# Altium PCB 28Pins_Project_V1I1_PCB.PcbDoc (part 3 of 3)
Units mm, origin at the board's own origin, x right, y up, seen from the top; angles counter-clockwise.
Board outline 68.58 x 53.34 mm, 2 copper layers (L1, L2), stack 1.671 mm thick; 106 components, 71 nets, 323 pads, 106 vias.
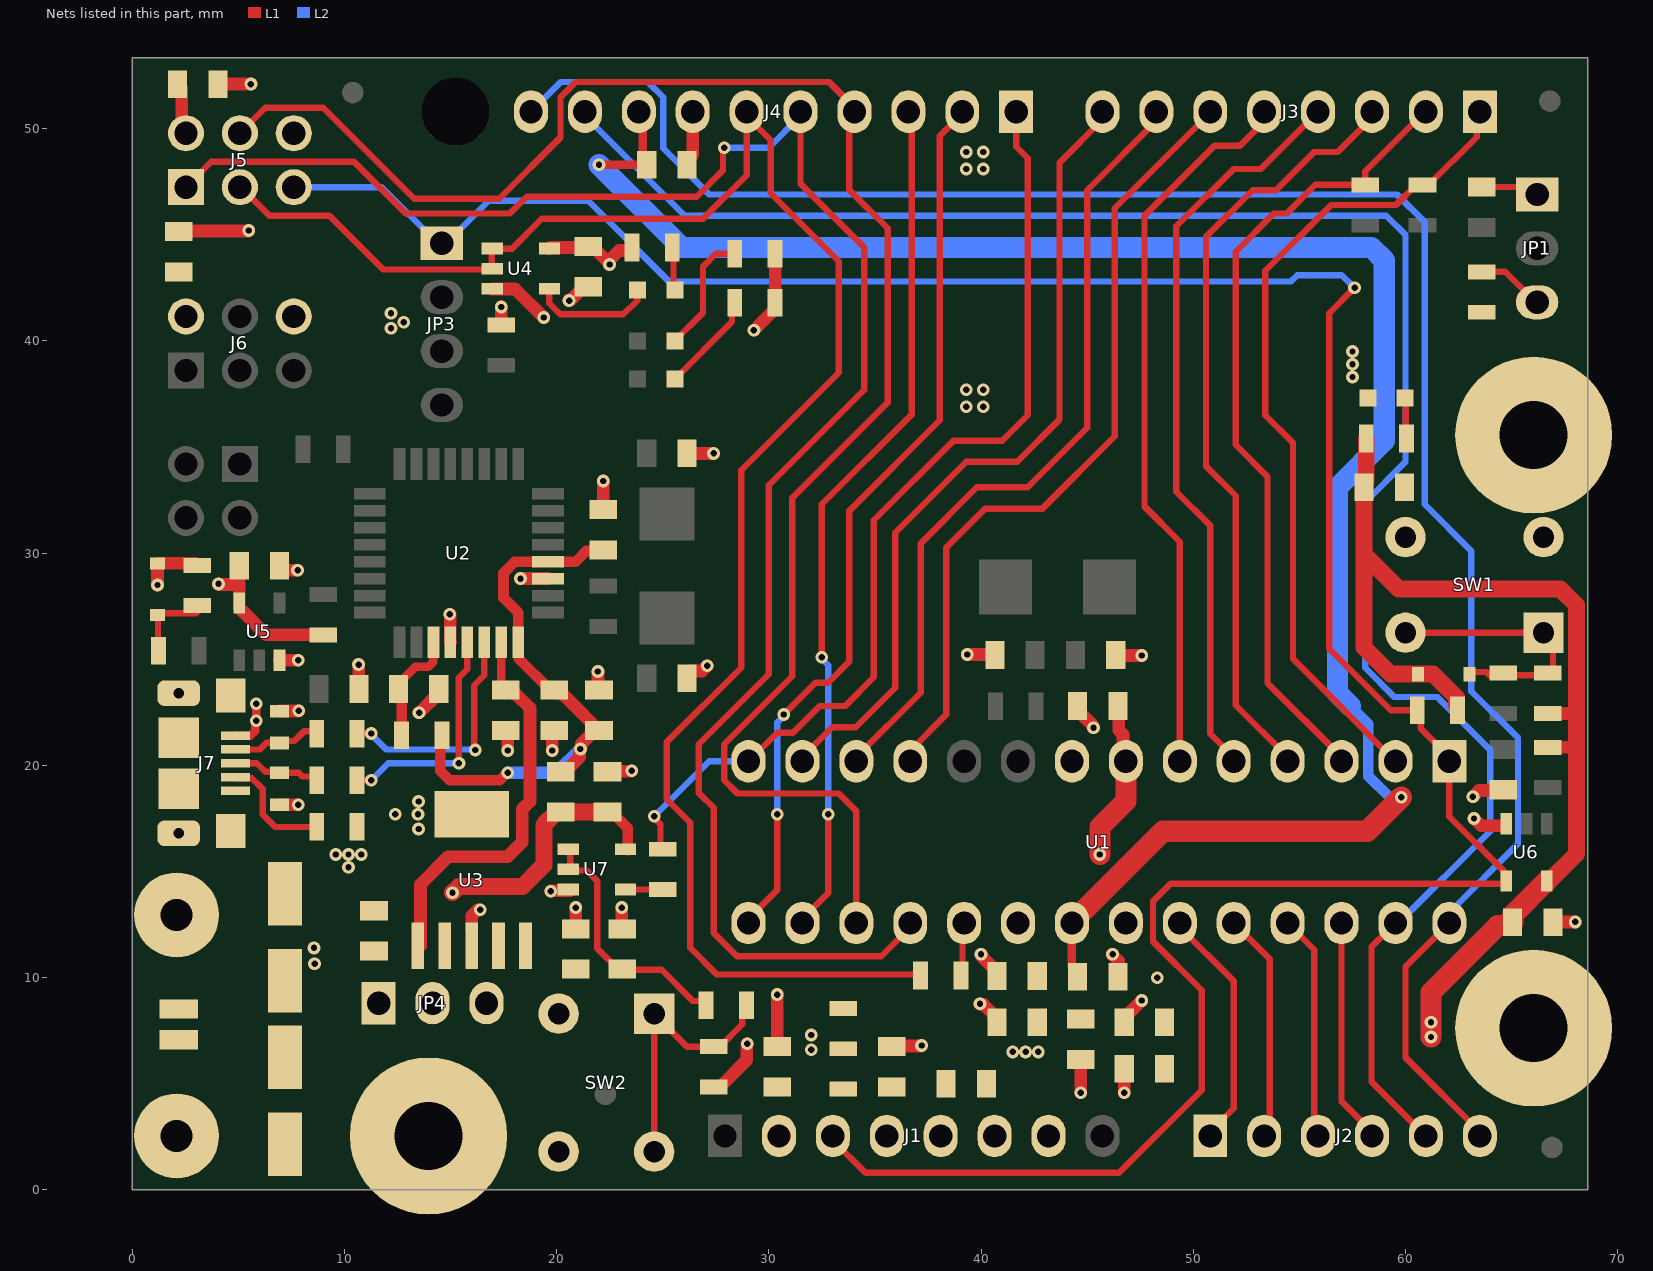
[diagram p2: the nets of this part, all layers, seen from the top]

## Via types
v1: diameter 0.6, hole 0.3, L1 to L2, tented both sides, 106 vias

## Nets (pads, with @x,y where several pads share a name; then routed paths per layer and width w, separated by ;. In a path a pad name is that pad's centre, name@x,y a point inside that pad or via, vN(x,y) a via of type N, cw(c..) or ccw(c..) an arc to the next point about the centre after c; other vN are vias at no path point) (continued)
328P_RESETn: J1.3 J5.5 JP3.1 R14.1 U1.1 U6.4 | length 133.2
  L1 w0.3: J1.3@33.02,2.54 33.02,2.34 34.56,0.8 46.5,0.8 50.4,4.7 50.4,9.4 48.1,11.7 48.1,13.6 48.925,14.425 64.625,14.425 U6.4@64.75,14.55 64.625,14.675 64.625,15.025 62.065,17.585 U1.1@62.065,20.193 62.065,20.393 60.722,21.736 60.722,22.428 R14.1@60.55,22.6 59.3,22.6 56.4,25.5 56.4,41.3 v1(57.6,42.5)
  L2 w0.3: J5.5@7.62,47.244 11.756,47.244 14.4,44.6 JP3.1@14.6,44.6 14.8,44.6 16.8,46.6 21.5,46.6 25.3,42.8 54.6,42.8 54.9,43.1 57,43.1 v1(57.6,42.5)
+3V3: C13.2 C16.2 J1.4 JP4.3 R28.2 U3.4 U3.5
+3V3_16U2_UCAP: C7.2 R26.1 U2.27 | length 5.5
  L1 w0.4: C7.2@12.55,23.6 12.8,23.85 12.8,24.1 13.35,24.65 13.966,24.65 14.2,24.884 U2.27@14.2,25.8
  L1 w0.5: C7.2@12.55,23.6 12.7,23.45 R26.1@12.7,21.425
+5/3V3_16U2: C3.2 C4.2 C5.2 FB1.2 R26.2 U2.4 U2.32 | length 26.6
  L1 w0.5: R26.2@14.6,21.425 14.525,21.35 14.525,19.739 14.964,19.3 17.323,19.3 17.673,19.65 v1(17.7,19.65) ; C4.2@19.9,23.55 19.7,23.55 18.225,25.025 18.225,25.775 U2.32@18.2,25.8 18.2,27.2 17.5,27.9 17.5,29.061 18.039,29.6 U2.4@19.6,29.6 20.9,29.6 21.4,30.1 22.15,30.1 C5.2@22.2,30.15
  L1 w0.6: C4.2@19.9,23.55 20.05,23.4 20.25,23.4 20.975,22.675 21.65,22 21.65,21.8 21.8,21.65 C3.2@22,21.65 ; FB1.2@20.2,19.7 20.4,19.7 21.087,20.387 21.087,20.737 v1(21.125,20.775) 21.163,20.813 21.163,21.013 C3.2@21.775,21.625
  L2 w0.6: v1(17.7,19.65) 20,19.65 v1(21.125,20.775)
+5/3V3_328P_AVCC: C22.2 C23.2 FB3.2 U1.20
+5/3V3_328P_VCC: C19.2 C20.2 FB2.2 U1.7 | length 7.5
  L1 w0.6: C20.2@46.45,22.8 46.486,22.764 46.486,21.664 46.689,21.461 U1.7@46.689,20.329
  L1 w1: v1(45.6,15.8) 45.6,17.1 46.825,18.325 U1.7@46.825,20.193
  other v1: 48.3,10
+5V: C2.1 C6.2 C12.2 C14.2 J1.5 J8.1 JP4.1 L1.2 R27.1 U2.31 U3.1 U3.2 | length 18.8
  L1 w0.4: U2.31@17.4,25.8 17.4,23.8 17.65,23.55 C6.2@17.7,23.55
  L1 w0.6: U3.1@13.59,11.5 13.59,14.39 14.9,15.7 17.7,15.7 18.38,16.38 18.38,17.93 18.75,18.3 18.75,22.7 18.05,23.4 17.85,23.4 C6.2@17.7,23.55
+5V/3V3: C8.2 C15.2 C18.2 C26.2 C28.2 C29.2 C30.2 C34.2 D5.1 D6.1 FB1.1 FB2.1 FB3.1 J1.2 J5.2 J6.2 JP4.2 R1.2 R2.2 R3.2 R4.2 R14.2 R15.2 R17.2 R18.2 R19.2 R20.2 R21.2 R27.2 R28.1 U4.5 U5.5 U6.5 U7.5 | length 92.7
  L1 w0.5: C29.2@22.4,17.8 22.6,17.8 23.35,17.05 U7.5@23.35,16
  L1 w0.6: v1(1.2,28.5) D5.1@1.2,29.519 R19.2@3.003,29.519 ; C18.2@2.15,52.1 2.345,51.905 2.345,49.979 J5.2@2.54,49.784 ; v1(4.075,28.55) 4.1,28.525 5.05,28.525 ; C30.2@5.05,29.4 5.05,28.525 ; R4.2@9,26.15 6.325,26.15 5.05,27.425 U5.5@5.05,27.65 5.05,28.525 ; v1(17.4,41.6) 17.4,40.8 17.45,40.75 R1.2@17.7,40.75 ; U4.5@19.65,44.35 19.7,44.4 21.45,44.4 C26.2@21.5,44.45 21.7,44.45 22.5,43.65 v1(22.5,43.6) ; v1@22.475,43.779 22.95,44.254 23.404,44.254 R15.2@23.55,44.4 ; R21.2@27.4,4.85 27.7,4.85 28.962,6.112 28.962,6.862 v1(28.981,6.881) ; v1@29.5,40.7 30.3,41.5 R3.2@30.3,41.8 R2.2@30.3,44.1 ; v1(44.7,4.575) FB3.1@44.7,6.15 ; v1(46.75,4.575) FB2.1@46.75,5.7 ; R18.2@66.7,20.85 68.05,20.85 ; R20.2@66.7,22.45 68.05,22.45
  L1 w0.8: v1(15.1,14) 15.4,14.3 18.4,14.3 19.4,15.3 19.4,17.2 20,17.8 FB1.1@20.2,17.8 C29.2@22.4,17.8 ; R17.2@58.15,35.4 58.15,33.4 58.05,33.3 C34.2@58.05,33.1 58.05,29.95 ; R14.2@62.4,22.85 62.4,23.2 61.3,24.3 D6.1@60.581,24.3 59.3,24.3 58.05,25.55 58.05,29.95 ; U6.5@66.75,14.55 66.775,14.55 68.05,15.825 68.05,20.85 68.05,22.45 68.05,27.55 67.3,28.3 59.7,28.3 58.05,29.95
  L1 w1: v1(61.2,7.2) v1(61.2,7.9) 61.2,9.3 64.35,12.45 65,12.45 65,12.55 C28.2@65.05,12.6 ; C28.2@65.05,12.75 65.05,12.95 U6.5@66.65,14.55
  other v1: 32,6.6 32,7.3 29.3,40.5 12.2,40.6 12.8,40.875 12.2,41.3
+5V_USB: C1.1 J7.1 L1.1 | length 2.3
  L1 w0.4: J7.1@4.875,21.4 5.577,21.4 5.812,21.634 5.812,22.062 v1(5.85,22.1) v1(5.85,22.9)
  other v1: 8.6,10.65 8.575,11.4
+AREF: C21.2 C24.2 J4.8 U1.21 | length 92.2
  L1 w0.4: v1(22,48.3) C21.2@24.25,48.3 24.25,48.55 24.3,48.6 24.213,48.6 24.063,48.75 24.063,50.613 J4.8@23.876,50.8 ; U1.21@44.285,12.573 44.285,10.515 44.55,10.25 C24.2@44.55,10.1
  L1 w1: U1.21@44.285,12.573 44.285,12.611 48.574,16.9 58.2,16.9 v1(59.8,18.5)
  L2 w0.5: 57.4,22.8 58.25,21.95 58.25,19.5 59.231,18.519 59.781,18.519 v1(59.8,18.5)
  L2 w1: v1(22,48.3) 25.9,44.4 58.4,44.4 59,43.8 59,35.3 56.8,33.1 56.8,23.4 57.4,22.8
AD0: J2.1 U1.23 | length 11.5
  L1 w0.3: U1.23@49.365,12.573 49.365,12.373 51.9,9.838 51.9,3.84 50.8,2.74 J2.1@50.8,2.54
AD1: J2.2 U1.24 | length 10.8
  L1 w0.3: U1.24@51.905,12.573 53.6,10.878 53.6,3.352 53.34,3.092 J2.2@53.34,2.54
AD2: J2.3 U1.25 | length 10.6
  L1 w0.3: U1.25@54.445,12.573 55.7,11.318 55.7,2.72 J2.3@55.88,2.54
AD3: J2.4 U1.26 | length 10.6
  L1 w0.3: U1.26@56.985,12.573 56.985,4.175 58.42,2.74 J2.4@58.42,2.54
AD4/SDA: J2.5 J4.9 U1.27 | length 91.5
  L1 w0.3: U1.27@59.525,12.573 58.4,11.448 58.4,5.1 J2.5@60.96,2.54
  L2 w0.3: J4.9@21.336,50.8 21.336,50.6 26.036,45.9 59.1,45.9 60,45 60,34.3 58.1,32.4 58.1,24.6 59.475,23.225 61.5,23.225 64,20.725 64,16.9 59.673,12.573 U1.27@59.525,12.573
AD5/SCL: J2.6 J4.10 U1.28 | length 95.4
  L1 w0.3: U1.28@62.065,12.573 60,10.508 60,6.24 63.5,2.74 J2.6@63.5,2.54
  L2 w0.3: J4.10@18.796,50.8 20.196,52.2 24.302,52.2 25.026,51.476 25.026,49.074 27.2,46.9 59.6,46.9 60.9,45.6 60.9,32.3 63.1,30.1 63.1,23.5 65.3,21.3 65.3,16.3 62.065,13.065 U1.28@62.065,12.573
BUTTON_RESETn: D6.2 R20.1 R24.1 SW1.1 SW1.2 | length 12.9
  L1 w0.3: SW1.2@60.35,26.25 66.85,26.25 66.95,26.15 66.95,24.45 67.15,24.25 67.2,24.25 67.05,24.25 65,24.25 63.95,24.25 63.8,24.4 63.119,24.4 D6.2@63.194,24.325
CON_USB_N: J7.2 R6.1 Z1.2 | length 4
  L1 w0.3: J7.2@4.875,20.75 6.025,20.75 6.35,21.075 6.925,21.075 Z1.2@6.95,21.05 ; Z1.2@6.95,21.15 7.65,21.15 8.1,21.6 ; 8.15,21.6 R6.1@8.6,21.6
CON_USB_P: J7.3 R7.1 Z2.2 | length 4
  L1 w0.3: J7.3@4.875,20.1 5.875,20.1 6.275,19.7 6.9,19.7 Z2.2@6.95,19.65 7.85,19.65 8.026,19.474 8.526,19.474 R7.1@8.6,19.4
GND: C1.2 C2.2 C3.1 C4.1 C5.1 C6.1 C7.1 C8.1 C9.1 C10.2 C12.1 C13.1 C14.1 C15.1 C16.1 C18.1 C19.1 C20.1 C21.1 C22.1 C23.1 C24.1 C25.1 C26.1 C27.2 C28.1 C29.1 C30.1 C31.1 C32.1 C33.1 C34.1 D1.1 J1.6 J1.7 J4.7 J5.6 J6.6 J7.5 J7.6 J7.7 J7.8 J7.9 J7.10 J7.11 J9.1 MH1.1 MH2.1 MH3.1 R8.2 R12.1 SW1.3 SW1.4 SW2.3 SW2.4 U1.8 U1.22 U2.3 U2.28 U3.3 U3.6 U4.3 U5.3 U6.3 U7.3 Z1.1 Z2.1 | length 49.7
  L1 w0.6: C8.1@2.2,45.15 2.225,45.175 5.475,45.175 v1(5.5,45.2) ; C18.1@4.05,52.1 v1(5.6,52.1) ; Z2.1@6.95,18.15 v1(7.825,18.15) ; Z1.1@6.95,22.55 6.963,22.562 7.838,22.562 v1(7.85,22.575) ; U5.3@6.95,24.95 v1(7.825,24.95) ; C30.1@6.95,29.4 6.95,29.35 7.1,29.2 v1(7.8,29.2) ; v1(10.675,24.75) 10.687,24.737 10.687,23.613 C31.1@10.7,23.6 ; v1(13.525,22.475) 14.45,23.4 C7.1@14.45,23.6 ; v1(14.975,27.125) 14.987,27.113 14.987,25.812 U2.28@15,25.8 ; U3.3@16,12.3 16,12.9 v1@16.3,13.2 ; U4.3@16.975,42.45 18.05,42.45 v1(19.4,41.1) ; v1(17.7,20.7) C6.1@17.7,21.65 ; v1(18.3,28.8) U2.3@19.6,28.8 ; v1(19.725,14.075) 19.737,14.088 20.637,14.088 U7.3@20.65,14.1 ; v1(19.8,20.7) 19.8,21.55 C4.1@19.9,21.65 ; v1(20.593,41.9) 20.631,41.938 20.688,41.938 21.3,42.55 C26.1@21.5,42.55 ; C13.1@20.9,12.3 v1(20.9,13.3) ; v1(21.95,24.425) 21.95,23.6 C3.1@22,23.55 ; C5.1@22.2,32.05 v1(22.2,33.4) ; C29.1@22.4,19.7 22.425,19.725 23.525,19.725 v1(23.55,19.75) ; v1(23.075,13.3) 23.075,12.325 C33.1@23.1,12.3 ; C10.2@26.15,24.1 26.15,24.3 26.3,24.45 26.85,24.45 v1(27.1,24.7) ; C9.1@26.15,34.7 v1(27.4,34.7) ; C21.1@26.15,48.3 26.15,48.5 26.416,48.766 J4.7@26.416,50.8 ; C15.1@30.4,6.75 v1(30.4,9.2) ; C16.1@35.6,6.75 C16.1@35.8,6.75 35.825,6.775 37.175,6.775 v1(37.2,6.8) ; v1(39.35,25.225) 40.625,25.225 C25.1@40.65,25.2 ; v1(39.95,8.775) 39.988,8.737 40.113,8.737 40.75,8.1 C22.1@40.75,7.9 ; v1(40,11.1) 40.038,11.062 40.038,10.987 40.75,10.275 C23.1@40.75,10.1 ; C20.1@44.55,22.8 44.55,22.6 45.262,21.888 45.262,21.813 v1(45.3,21.775) ; v1(46.2,11.1) 46.2,11.066 46.475,10.791 46.475,10.125 C24.1@46.45,10.1 ; C27.2@46.375,25.175 v1(47.575,25.175) ; C19.1@46.75,7.9 46.75,8.1 v1(47.575,8.925) ; v1(63.175,18.525) 63.464,18.814 64.564,18.814 C32.1@64.6,18.85 ; v1(63.225,17.5) 63.575,17.15 U6.3@64.725,17.15 ; C28.1@66.95,12.6 66.975,12.625 v1(68,12.625)
  other v1: 41.5,6.5 42.1,6.5 42.7,6.5 16.4,13.2 10.2,15.2 9.6,15.8 10.2,15.8 10.8,15.8 13.5,17 12.4,17.7 13.475,17.7 13.5,18.3 39.3,36.9 40.1,36.9 39.3,37.7 40.1,37.7 57.5,38.3 57.5,38.9 57.5,39.5 39.3,48.1 40.1,48.1 39.3,48.9 40.1,48.9
IO0: J3.1 R10.2 U1.2 | length 39.5
  L1 w0.3: U1.2@59.525,20.193 54.7,25.018 54.7,35.2 53.4,36.5 53.4,43.3 56.5,46.4 59.55,46.4 60.5,47.35 R10.2@60.8,47.35 61.1,47.35 63.35,49.6 63.35,50.65 J3.1@63.5,50.8
IO1: J3.2 R11.2 U1.3 | length 38.1
  L1 w0.3: U1.3@56.985,20.193 56.985,20.393 53.5,23.878 53.5,33.6 52,35.1 52,44.2 53.8,46 54.4,46 55.75,47.35 R11.2@58.1,47.35 58.1,48 60.9,50.8 J3.2@60.96,50.8
IO2: J3.3 U1.4 | length 36.7
  L1 w0.3: U1.4@54.445,20.193 54.445,20.393 52,22.838 52,32.7 50.6,34.1 50.6,44.9 52.8,47.1 53.9,47.1 55.7,48.9 56.8,48.9 58.42,50.52 J3.3@58.42,50.8
IO3: J3.4 U1.5 | length 35.2
  L1 w0.3: U1.5@51.905,20.193 51.905,20.393 50.8,21.498 50.8,31.3 49.2,32.9 49.2,45.4 51.9,48.1 53.18,48.1 J3.4@55.88,50.8
IO4: J3.5 U1.6 | length 34.3
  L1 w0.3: U1.6@49.365,20.193 49.365,30.535 47.7,32.2 47.7,45.9 51,49.2 52.2,49.2 53.34,50.34 J3.5@53.34,50.8
IO5: J3.6 U1.11 | length 38
  L1 w0.3: U1.11@36.665,20.193 36.665,20.691 38.353,22.379 38.353,30.253 40.2,32.1 42.9,32.1 46.3,35.5 46.3,46.256 50.8,50.756 J3.6@50.8,50.8
IO6: J3.7 U1.12 | length 37.9
  L1 w0.3: U1.12@34.125,20.193 34.125,20.393 37.153,23.421 37.153,30.453 39.8,33.1 42.2,33.1 45,35.9 45,47.1 48.26,50.36 J3.7@48.26,50.8
IO7: J3.8 U1.13 | length 38.5
  L1 w0.3: U1.13@31.585,20.193 31.585,20.393 32.992,21.8 34.1,21.8 35.953,23.653 35.953,30.953 39.3,34.3 41.7,34.3 43.7,36.3 43.7,48.4 45.72,50.42 J3.8@45.72,50.8
IO8: J4.1 R22.2 U1.14 | length 46.2
  L1 w0.3: v1(24.6,17.6) 24.6,17.519 24.9,17.219 24.9,16.25 25.15,16.25 R22.2@25.3,16.1 ; U1.14@29.045,20.193 30.395,21.543 31.143,21.543 32.4,22.8 33.6,22.8 34.953,24.153 34.953,31.553 38.7,35.3 41,35.3 42.2,36.5 42.2,48.6 41.656,49.144 J4.1@41.656,50.8
  L2 w0.3: v1(24.6,17.6) 27.196,20.197 29.041,20.197 U1.14@29.045,20.193
IO9: J4.2 U1.15 | length 42.8
  L1 w0.3: U1.15@29.045,12.573 29.045,12.773 30.4,14.128 v1(30.4,17.7) ; v1(30.7,22.4) 31.329,23.029 32.2,23.9 32.8,23.9 33.8,24.9 33.8,32 38.053,36.253 38.053,49.653 39.116,50.716 J4.2@39.116,50.8
  L2 w0.3: v1(30.4,17.7) 30.4,22.019 30.7,22.319 v1(30.7,22.4)
MISO: J4.5 J5.1 U1.18 | length 87.1
  L1 w0.3: J5.1@2.54,47.244 3.74,48.444 10.456,48.444 12.9,46 17.8,46 18.6,46.8 26.6,46.8 27.843,48.043 27.843,49.043 v1(27.9,49.1) ; J4.5@31.496,50.8 31.496,47.404 34.5,44.4 34.5,37.7 30,33.2 30,24.3 26.7,21 26.7,18.7 27.4,18 27.4,12.1 28.5,11 35.292,11 36.665,12.373 U1.18@36.665,12.573
  L2 w0.3: v1(27.9,49.1) 29.996,49.1 31.496,50.6 J4.5@31.496,50.8
MOSI: J4.4 J5.4 U1.17 | length 82.9
  L1 w0.3: J5.4@5.08,49.784 6.28,50.984 9.016,50.984 13.3,46.7 17.3,46.7 20.186,49.586 20.186,51.476 20.91,52.2 32.836,52.2 34.036,51 J4.4@34.036,50.8 33.8,50.564 33.8,47.1 35.6,45.3 35.6,37.1 31.1,32.6 31.1,24.2 27.895,20.995 27.895,19.517 27.9,19.512 27.9,19.3 28.525,18.675 33.3,18.675 34.125,17.85 U1.17@34.125,12.573
NetC11_2: C11.2 JP1.1 | length 2.7
  L1 w0.3: C11.2@63.6,47.25 65.85,47.25 JP1.1@66.2,46.9
NetD1_2: D1.2 R17.1 | length 1.9
  L1 w0.3: D1.2@59.975,37.3 60.012,37.263 60.012,35.438 R17.1@60.05,35.4
NetD2_1: D2.1 U4.4 | length 5.8
  L1 w0.3: U4.4@19.65,42.45 19.65,41.769 20.169,41.25 23.15,41.25 23.8,41.9 23.8,42.375 D2.1@23.825,42.4
NetD2_2: D2.2 R15.1 | length 2.1
  L1 w0.3: R15.1@25.45,44.4 25.512,44.337 25.512,42.462 D2.2@25.575,42.4
NetD3_2: D3.2 R2.1 | length 5.8
  L1 w0.3: D3.2@25.575,40 26.9,41.325 26.9,43.5 27.5,44.1 R2.1@28.4,44.1
NetD4_2: D4.2 R3.1 | length 4.8
  L1 w0.3: D4.2@25.575,38.2 28.269,40.894 28.269,41.669 R3.1@28.4,41.8
NetD5_2: D5.2 R19.1 R23.1 | length 3.7
  L1 w0.3: R23.1@1.25,25.4 1.225,25.425 1.225,27.056 D5.2@1.2,27.081 1.285,27.165 3.015,27.165 R19.1@3.1,27.25
NetJ7_4: J7.4 R8.1 | length 5.5
  L1 w0.3: J7.4@4.875,19.45 4.925,19.4 5.644,19.4 6.15,18.894 6.15,17.705 6.755,17.1 R8.1@8.7,17.1
NetJP1_3: JP1.3 R12.2 | length 3.2
  L1 w0.3: R12.2@63.6,43.25 64.7,43.25 66.13,41.82 JP1.3@66.2,41.82
NetR22_1: R22.1 U7.4 | length 2
  L1 w0.3: U7.4@23.35,14.1 23.4,14.15 25.25,14.15 R22.1@25.3,14.2
SCK: J4.6 J5.3 R13.2 U4.1 U4.2 | length 87
  L1 w0.3: J5.3@5.08,47.244 5.133,47.244 6.477,45.9 9.3,45.9 11.836,43.364 16.939,43.364 U4.2@16.975,43.4 ; U4.2@16.953,43.422 16.953,44.328 U4.1@16.975,44.35 ; U4.1@17.003,44.35 17.903,44.35 19.303,45.75 26.903,45.75 28.959,47.806 J4.6@28.959,50.594 ; J4.6@28.956,50.8 28.956,50.597 J4.6@28.959,50.594 ; R13.2@37.15,10.1 37.1,10.15 27.55,10.15 26.3,11.4 26.3,17.3 25.2,18.4 25.2,21.1 28.7,24.6 28.7,33.9 33.3,38.5 33.3,43.753 30.1,46.953 30.1,49.453 J4.6@28.959,50.594
SCK_R: R13.1 U1.19 | length 2.5
  L1 w0.3: R13.1@39.05,10.1 39.127,10.178 39.127,12.495 U1.19@39.205,12.573
SS: J4.3 U1.16 | length 40.7
  L1 w0.3: U1.16@31.585,12.573 31.585,12.773 32.8,13.988 v1(32.8,17.7) ; v1(32.5,25.099) 32.5,32.3 36.729,36.529 36.729,50.647 J4.3@36.576,50.8
  L2 w0.3: v1(32.5,25.099) 32.5,25.018 32.8,24.718 v1(32.8,17.7)
USB_N: R6.2 U2.30 | length 11.3
  L1 w0.3: R6.2@10.5,21.5 v1(11.275,21.5) ; v1(16.175,20.725) 16.125,20.775 16.125,23.77 16.6,24.245 U2.30@16.6,25.8
  L2 w0.3: v1@11.225,21.5 11.975,20.75 16.15,20.75 v1(16.175,20.725)
USB_P: R7.2 U2.29 | length 11.1
  L1 w0.3: R7.2@10.5,19.3 v1(11.275,19.3) ; v1(15.4,20.1) 15.4,24.13 15.8,24.53 U2.29@15.8,25.8
  L2 w0.3: v1(11.275,19.3) 12.075,20.1 v1(15.4,20.1)
USER_BUTTON: R21.1 R25.1 SW2.1 SW2.2 | length 12.7
  L1 w0.3: SW2.2@24.6,1.8 SW2.1@24.6,8.3 26.15,6.75 R21.1@27.4,6.75 27.7,6.75 28.75,7.8 28.75,8.5 R25.1@28.95,8.7
USER_BUTTON_BUF: C33.2 R25.2 U7.1 U7.2 | length 11.8
  L1 w0.3: U7.1@20.65,16 20.65,15.05 21.425,15.05 21.925,14.55 21.925,11.375 22.9,10.4 C33.2@23.1,10.4 23.125,10.375 24.95,10.375 26.426,8.899 26.851,8.899 R25.2@27.05,8.7
pads on no net: FID1.1 FID2.1 FID3.1 FID4.1 J1.1 J1.8 MH4.1 U2.5 U2.6 U2.7 U2.12 U2.14 U2.22 U2.23 U2.25 U2.26

## Polygon pours and split planes (outlines as drawn)
+5/3V3_328P_VCC on L2 "+5/3V3_328P_VCC_L02_P000" (solid, remove dead copper, pour order 0): 45.105,16.2 45.097,15.195 46.055,15.195 47.93,13.816 47.831,9.5 50.778,9.5 50.778,16.2
GND on L2 "GND_L02_P007" (solid, remove dead copper, pour order 7): 57.1,39.8 55.3,38 23.252,38 20.9,40.1 20.9,42.2 19.1,42.2 19.1,37.57 12.4,37.57 12.4,39.27 9.5,39.27 9.5,52.97 0.2,52.97 0.2,51.37 5.2,51.37 5.2,23.57 7.4,23.57 7.4,17.77 9.2,17.77 9.2,14.8 16,14.8 16,12.9 26.5,12.9 26.5,12.6 30.383,8.717 34.453,8.717 37.1,6.07 50.5,6.07 53,8.57 62.2,8.57 62.2,0.27 68.2,0.27 68.2,13.77 63.4,13.77 63.4,11.37 58.4,11.37 58.3,11.47 58.3,14.37 60.6,14.37 63.5,17.27 63.5,18.97 61.2,18.97 61.2,17.37 57.8,17.37 56.6,18.57 55.9,18.57 55.9,33.848 57.982,35.846 57.982,39.8
+5V on L2 "+5V_L02_P002" (solid, remove dead copper, pour order 2): 0.3,0.3 0.3,5.7 8.7,5.7 10.7,7.7 10.7,9.9 12.5,9.9 12.5,7.5 18.9,7.5 22.7,3.7 26.8,3.7 26.8,1.2 37,1.2 37,3.8 39.3,3.8 39.3,0.3
+3V3 on L2 "+3V3_L02_P003" (solid, remove dead copper, pour order 3): 15.8,7.8 19.2,7.8 23,4 33.7,4 34.7,3 34.7,1.5 36.4,1.5 36.4,3.7 34.2,5.9 28.7,5.9 27.55,7.05 23.2,7.05 23.2,9.1 21.6,10.7 20.1,10.7 16.5,10.7 15.8,10
+5V/3V3 on L2 "+5V/3V3_L02_P005" (solid, remove dead copper, pour order 5): 0.3,6 8.6,6 10.4,7.8 10.4,10.2 12.8,10.2 12.8,7.8 15.4,7.8 15.4,9.9 16.5,11 21.9,11 23.4,9.5 25.9,9.5 25.9,7.4 28,7.4 29.1,6.3 34.4,6.3 36.6,4.1 39.8,4.1 39.8,0.3 62,0.3 62,8.3 53.2,8.3 50.7,5.8 37.1,5.8 34.4,8.5 30.1,8.5 26.2,12.4 15.6,12.4 15.6,14.4 9.3,14.4 9.3,10 7.7,10 7.7,12.2 7,12.9 7,14.5 5.6,15.9 5.6,18.4 4.9,19.1 4.9,51.1 0.3,51.1
+5V/3V3 on L2 "+5V/3V3_L02_P001" (solid, remove dead copper, pour order 1): 24.411,42.077 30.7,42.121 30.7,40 23.476,40 21.124,42.6 18.6,42.6 18.6,38.1 13,38.1 13,39.7 10.1,39.7 10.1,43.5 16.3,43.5 16.3,45.4 21.272,45.4
GND on L2 "GND_L02_P006" (solid, remove dead copper, pour order 6): 68.2,52.9 68.2,47.8 27.6,47.8 25.6,49.8 25.6,52.9
+5V_USB on L2 "+5V_USB_L02_P004" (solid, remove dead copper, pour order 4): 5.4,23.3 5.4,19.2 6,18.6 6,16 7.4,14.6 7.4,13.2 8,12.471 8,10.3 8.9,10.3 8.9,17.5 7.2,17.5 7.2,22.1 7.2,23.3
GND on L1 "GND_L01_P023" (solid, remove dead copper, pour order 23): 20.1,7.1 21.4,7.1 21.4,9.3 19.1,9.3 19.1,7.1 10.3,7.1 10.3,12.3 12,12.3 12.7,13 12.7,15.2 14.1,16.6 17.7,16.6 17.7,18.8 12,18.8 11,17.8 10.2,17.8 10.2,16.1 6.9,16.1 5.5,17.5 5.5,19 3.3,19 3.3,22.4 5.3,22.4 5.3,24.1 0.3,24.1 0.3,9.8 3.5,9.8 5.8,12.1 9.4,12.1 9.4,8.6 8.6,7.8 6.1,7.8 6.1,4.6 9.9,4.6 9.9,0.3 21.5,0.3 21.5,2.8 20.1,2.8
+5V/3V3 on L1 "+5V/3V3_L01_P015" (solid, remove dead copper, pour order 15): 29.6,5.3 29.6,1.4 31.7,1.4 31.7,3.4 32.3,4 32.3,5.9 32.7,6.3 34.2,6.3 34.2,7.6 31.4,7.6 31.4,5.6 31.1,5.3
+3V3 on L1 "+3V3_L01_P016" (solid, remove dead copper, pour order 16): 36.5,5.3 36.5,1.5 34.7,1.5 34.7,3.1 32.6,4.4 32.6,5.3
GND on L1 "GND_L01_P022" (solid, remove dead copper, pour order 22): 38.7,49.2 40.9,49.2 40.9,36.6 38.7,36.6
GND on L1 "GND_L01_P021" (solid, remove dead copper, pour order 21): 62.9,41.7 62.9,40.1 57.2,40.1 57.2,38 57.8,38 57.8,36.9 58.6,36.9 58.6,38 61.1,38 61.1,34.1 59.5,34.1 59.5,32.4 59,31.9 59,30.3 59.6,29.7 68.3,29.7 68.3,40.1 64.3,40.1 64.3,41.7
+5/3V3_328P_VCC on L1 "+5/3V3_328P_VCC_L01_P020" (solid, remove dead copper, pour order 20): 47.9,10.4 47.9,9.6 48.2,9.3 48.2,5 49.2,5 49.6,5.4 49.6,9.4 48.6,10.4
+5/3V3_328P_AVCC on L1 "+5/3V3_328P_AVCC_L01_P019" (solid, remove dead copper, pour order 19): 40.6,13.9 40.6,12 42.1,10.875 42.1,7.4 45.4,7.4 45.4,8.5 43.6,8.5 43.6,10.9 43,11.5 43,13.9
GND on L1 "GND_L01_P018" (solid, remove dead copper, pour order 18): 39.8,1.5 44,1.5 44,3.8 43.2,4.6 43.2,6.8 41.3,6.8 39.8,5.7
+5V on L1 "+5V_L01_P017" (solid, remove dead copper, pour order 17): 37,1.5 39.3,1.5 39.3,3.8 38.8,4.3 38.8,7.9 37.756,8.944 32.6,8.944 32.6,8.2 34.3,8.2 34.8,7.7 37.3,7.7 37.8,7.2 37.8,6.3 37,5.5
+5V/3V3 on L1 "+5V/3V3_L01_P014" (solid, remove dead copper, pour order 14): 3.3,40.3 3.3,42.3 8.3,42.3 8.9,41.7 8.9,40.3 13.2,40.3 13.2,41.9 10.9,41.9 8.9,43.9 1.5,43.9 1.5,40.3
+5V on L1 "+5V_L01_P013" (solid, remove dead copper, pour order 13): 10.7,7.8 12.5,7.8 12.5,9.6 13.3,10.4 15.2,10.4 15.2,12.6 13,12.6 12.1,11.7 10.7,11.7
+3V3 on L1 "+3V3_L01_P011" (solid, remove dead copper, pour order 11): 15.8,7.8 18.7,7.8 18.7,9.6 21.6,9.6 21.6,10.9 19.9,10.9 19.9,12.6 17.1,12.6 17.1,10.1 15.8,10.1
+5V_USB on L1 "+5V_USB_L01_P010" (solid, remove dead copper, pour order 10): 0.3,9.4 0.3,8.1 8,8.1 8,10.2 8.9,10.2 8.9,11.8 8.2,11.8 8.2,11.3 5.4,11.3 3.5,9.4
+5V on L1 "+5V_L01_P008" (solid, remove dead copper, pour order 8): 0.3,7.4 4,7.4 4,3.6 8,3.6 8,0.3 0.3,0.3

## Other copper
L2:
  pour cut-out: 8.366,31.517 10.233,31.517 10.231,31.519 10.233,37.3 8.361,37.3 8.361,37.17 8.361,31.515

## Silkscreen, mask and mechanical layers (free items; w line width, h text height)
Top Overlay:
  text "ICSP" at 5.2,51.4 h1
  text "." at 40.402,46.493 h1.27 r180
  text "." at 40.622,46.428 h1.27 r180
  text "..............." at 36,46.4 h1.27
  text "." at 35.71,46.365 h1.27
  text "." at 40.827,46.318 h1.27 r180
  text "." at 35.482,46.279 h1.27
  text "." at 41.023,46.186 h1.27 r180
  text "." at 35.259,46.16 h1.27
  text "." at 41.18,46.02 h1.27 r180
  text "." at 35.081,46.012 h1.27
  text "." at 34.943,45.832 h1.27
  text "." at 41.32,45.801 h1.27 r180
  text "." at 34.823,45.628 h1.27
  text "." at 41.434,45.57 h1.27 r180
  text "." at 34.734,45.374 h1.27
  text "." at 41.484,45.301 h1.27 r180
  text "." at 34.698,45.152 h1.27
  text "." at 41.497,45.064 h1.27 r180
  text "." at 34.712,44.915 h1.27
  text "." at 41.462,44.843 h1.27 r180
  text "." at 34.762,44.646 h1.27
  text "." at 41.373,44.589 h1.27 r180
  text "." at 34.875,44.416 h1.27
  text "." at 41.253,44.384 h1.27 r180
  text "UNO" at 35.592,44.235 h3.5
  text "." at 35.015,44.197 h1.27
  text "." at 41.114,44.205 h1.27 r180
  text "." at 40.937,44.056 h1.27 r180
  text "." at 35.172,44.031 h1.27
  text "." at 40.713,43.938 h1.27 r180
  text "." at 35.369,43.898 h1.27
  text "." at 40.485,43.851 h1.27 r180
  text "." at 35.574,43.789 h1.27
  text "." at 35.793,43.724 h1.27
  text "..............." at 36.1,43.7 h1.27
  text "ICSP1" at 3.7,42.7 h1
  text "U" at 26.7,41.8 h1
  text "Compatible" at 43.4,41.793 h1
  text "ARDUINO" at 34.6,41.623 h1.8
  text "www.arduino.cc" at 35.2,39.9 h1
  text "T" at 26.8,39.3 h1
  text "R" at 26.8,37.6 h1
  text "3" at 0.2,33.7 h1
  text "4" at 0.2,31.1 h1
  text "2" at 6.7,31 h1
  text "RESET" at 58.3,26.4 h1 r90
  text "14" at 29.5,21.9 h1 r90
  text "10" at 39.6,21.9 h1 r90
  text "5" at 52.4,21.9 h1 r90
  text "16" at 31.8,9.3 h1 r90
  text "25" at 55,9.1 h1 r90
  text "USER" at 18.9,3.3 h1 r90
Bottom Overlay:
  lines w0.2: 11.9,15 11.9,15.7 ; 11.9,31.9 17,31.9 ; 13.6,22.3 13.6,33.6 ; 14.2,10.2 14.2,15.7 ; 15.3,22.2 15.3,33.6 ; 16.5,15 16.5,15.7 ; 65.8,15.5 67.8,15.5 ; 65.8,17.3 67.8,17.3 ; 65.8,19 67.8,19 ; 65.8,20.8 67.8,20.8 ; 65.8,22.6 67.8,22.6
  lines w0.254: 11.9,22.2 17,22.2 17,33.6 11.9,33.6 11.9,22.2 ; 65.8,13.8 67.8,13.8 67.8,24.6 65.8,24.6 65.8,13.8
  lines w0.5: 11.6,7.2 11.6,6.6 14.2,6.6 14.2,7.2 ; 12.4,15.5 13.7,15.5 ; 14.7,15.5 16,15.5 ; 16.2,36.8 16.7,36.8 16.7,39.4 16.2,39.4 ; 67.7,44.3 68.2,44.3 68.2,46.9 67.7,46.9
  text "AR/DF" at 66.684,52.3 h1.5 r90
  text "GND" at 27.074,49.6 h2.2 r90
  text "AD4/SDA" at 21.974,49.5 h2.2 r90
  text "13" at 29.574,49.5 h2.2 r90
  text "AD5/SCL" at 19.474,49.4 h2.2 r90
  text "+AREF" at 24.6,49.4 h2.2 r90
  text "12" at 32.252,49.286 h2.2 r90
  text "11~" at 34.6,49.2 h2.2 r90
  text "7" at 46.4,49.2 h2.2 r90
  text "10~" at 37.274,49.1 h2.2 r90
  text "6~" at 48.974,49.1 h2.2 r90
  text "5~" at 51.474,49.1 h2.2 r90
  text "4" at 54,49.1 h2.2 r90
  text "3~" at 56.474,49.1 h2.2 r90
  text "2" at 59,49.1 h2.2 r90
  text "9~" at 39.574,49 h2.2 r90
  text "8" at 42.374,49 h2.2 r90
  text "1 TX (OUT)" at 61.186,49 h2.2 r90
  text "0 RX (IN)" at 63.786,49 h2.2 r90
  text "dW/PROG/ISP" at 12.779,45.9 h1.8 r90
  text "Design based on FEDEVEL schematic /  / Layout by  / Jules Dn  2025" at 46,39.65 h2 r90
  text "BOARD VARIANT" at 11.382,33.5 h1.5 r90
  text "5V/3V3" at 14.882,31.4 h1.5 r90
  text "CUSTOM" at 16.582,31.4 h1.5 r90
  text "FIXED 5V" at 13.282,31.3 h1.5 r90
  text "A" at 67.5,24.3 h2.2 r90
  text "MODBOX" at 65.274,23.7 h2.2 r90
  text "B" at 67.5,22.3 h2.2 r90
  text "C" at 67.476,20.5 h2.2 r90
  text "D" at 67.5,18.7 h2.2 r90
  text "IO" at 14.874,18 h2.2 r90
  text "E" at 67.5,16.9 h2.2 r90
  text "+5V INPUT POWER" at 5.679,15.1 h1.8 r90
  text "F" at 67.5,15.1 h2.2 r90
  text "3.3V" at 17.474,14.2 h2.2 r90
  text "5V" at 12.374,13.6 h2.2 r90
  text "(OPTIONAL)" at 7.518,11.8 h1.5 r90
  text "RESET" at 33.674,10.5 h2.2 r90
  text "-" at 3.354,10.4 h5 r90
  text "3.3/5V" at 31.274,9.8 h2.2 r90
  text "+3.3V" at 36.274,9.2 h2.2 r90
  text "GND" at 41.374,8.3 h2.2 r90
  text "GND" at 43.774,8.3 h2.2 r90
  text "+5V" at 38.774,7.6 h2.2 r90
  text "]" at 17.378,7.4 h4 r90
  text "+" at 3.759,7 h5 r90
  text "NC" at 28.576,6.8 h2.2 r90
  text "NC" at 46.476,6.7 h2.2 r90
  text "A0" at 51.474,6.5 h2.2 r90
  text "A1" at 54.1,6.5 h2.2 r90
  text "A2" at 56.5,6.5 h2.2 r90
  text "A3" at 59.074,6.5 h2.2 r90
  text "A4" at 61.6,6.5 h2.2 r90
  text "A5" at 66.274,3.7 h2.2 r90
Mechanical Drawing:
  circle w1.016: c66.04,35.56 r1.6
  circle w1.016: c66.04,7.62 r1.6
  circle w1.016: c13.97,2.54 r1.6
  circle w1.016: c15.24,50.8 r1.6
  lines w1.016: 0,0 68.58,0 68.58,53.215 68.455,53.34 0,53.34 0,0
  text ".VersionRevision" at 44.7,61.2 h3.5
  text "Mechanical Drawing /   of 28Pins" at 4,60.5 h3.5
  text "Units: mils" at -42.119,-12.119 h2.03
  text "Scale: 1:1" at -42.119,-17.119 h2.03
Manufacturing Notes:
  lines w0.508: 0,-48 89,-48 ; 0,-38 89,-38 ; 43,-48 43,-38 ; 71,-38 71,-30 ; 0,-55 89,-55 89,-30 0,-30 0,-55
  text "FILES: / *.GTO - Top Overlay / *.GTP - Top Paste / *.GTS - Top Solder / *.GTL - L1 (Positive) / *.GBL - L2 (Positive) / *.GBS - Bottom Solder / *.GBO - Bottom Overlay / *.GM2 - Mechanical Drawing / *.GM3 - Manufacturing Notes / *.GM4 - License / *.GM28 - Board Outline" at 0,77.5 h2.03
  text "BOARD INFO /  / Minimum Track: 200um / Minimum Gap: 200um / Minimum Through Hole VIA: 0.6mm (pad) / 0.3mm (drill). Drilling L1-L2 /  / 1. FINISHED PANEL THICKNESS IS NOT CRITICAL: TO BE APPROXIMATELY 1.6mm /  / 2. BOARD FINISH: IMMERSION Au/ELECTROLESS Ni; 0.05-0.12 um GOLD; 3-6 um NICKEL /  / 3. SOLDER RESIST: APPLY TO BOTH SIDES COLOUR - BLUE /  / 4. COMPONENT IDENT: COLOUR TO BE WHITE /  / 5. PANELIZE THE BOARD (4PCS PER PANEL). PLACE FIDUTIALS ON PANEL STRIPS AS FOLLOWS: /  / - FIDUCIAL DIAMETER 1-105mm, SOLDER MASK OPENING AT LIST 1mm GREATER THAN FIDUCIAL / - MINIMUM 4mm DISTANCE FROM THE PANEL EDGE / - 3 FIDUTIALS SHOULD LIE ON TWO LINES THAT INTERSECTS AT A RIGHT ANGLE / - PLACE ONE FIDUTIAL INTO EACH PANEL CORNER (FOUR ON THE TOP LAYER)" at 98,55 h2.03
  text "28Pins" at 5.5,-35.5 h3
  text ".VersionRevision" at 73.5,-35.5 h3
  text "Copyright 2015  / FEDEVEL" at 5,-46 h1.52
  text "Designed by FEDEVEL / www.fedevel.com" at 46,-46 h1.52
  text "Contact: Mahla.gh@yahoo.com" at 5.254,-52.238 h1.52
Board Outline:
  lines w0.3: 0,0 0,53.34 68.455,53.34 68.58,53.215 68.58,0 0,0
ASM Top:
  text "Assembly TOP of 28Pins" at 13.654,61.162 h1.52
  text ".VersionRevision" at 48.254,60.954 h1.52
  text ".VariantName" at 23.254,57.254 h1.52

## Dimensions
2.54,47.244 to 0,0 on Mechanical Drawing
2.54,38.608 to 0,0 on Mechanical Drawing
66.04,35.56 to 0,0 on Mechanical Drawing
66.04,35.56 to 0,0 on Mechanical Drawing
2.2,23.4 to 0,0 on Mechanical Drawing
50.8,2.54 to 0,0 on Mechanical Drawing
63.5,50.8 to 0,0 on Mechanical Drawing
63.5,50.8 to 0,0 on Mechanical Drawing
41.656,50.8 to 0,0 on Mechanical Drawing
27.94,2.54 to 0,0 on Mechanical Drawing
15.24,50.8 to 0,0 on Mechanical Drawing
13.97,2.54 to 0,0 on Mechanical Drawing
2.1,12.954 to 0,0 on Mechanical Drawing
50.8,2.54 to 0,0 on Mechanical Drawing
2.1,12.954 to 0,0 on Mechanical Drawing
2.54,47.244 to 0,0 on Mechanical Drawing
66.04,7.62 to 0,0 on Mechanical Drawing
0,0 to 68.58,0 on Mechanical Drawing
0,0 to 0,53.34 on Mechanical Drawing

## Text inside footprints (layer, text, board x,y; h text height)
J1: Top Overlay "1" at 28.4,0.5 h1 r90
J2: Top Overlay "1" at 51.3,0.5 h1 r90
J3: Top Overlay "1" at 64,52.6 h1 r90
J4: Top Overlay "1" at 42.2,52.6 h1 r90
J5: Top Overlay "1" at 0.525,46.725 h1
J6: Top Overlay "1" at 0.6,38 h1
JP1: Top Overlay "1" at 67.875,46.5 h1
JP2: Top Overlay "1" at 6.7,33.7 h1
JP3: Top Overlay "1" at 12.5,44.3 h1
JP4: Top Overlay "1" at 9.6,8.2 h1